# Altium PCB AX301_AX4010.PcbDoc (part 3 of 10)
Units mm, origin at the board's own origin, x right, y up, seen from the top; angles counter-clockwise.
Board outline 131.7 x 91.8 mm, 4 copper layers (Top Layer, GND, Mid-Layer 1, Bottom Layer); 191 components, 338 nets, 1108 pads, 420 vias.
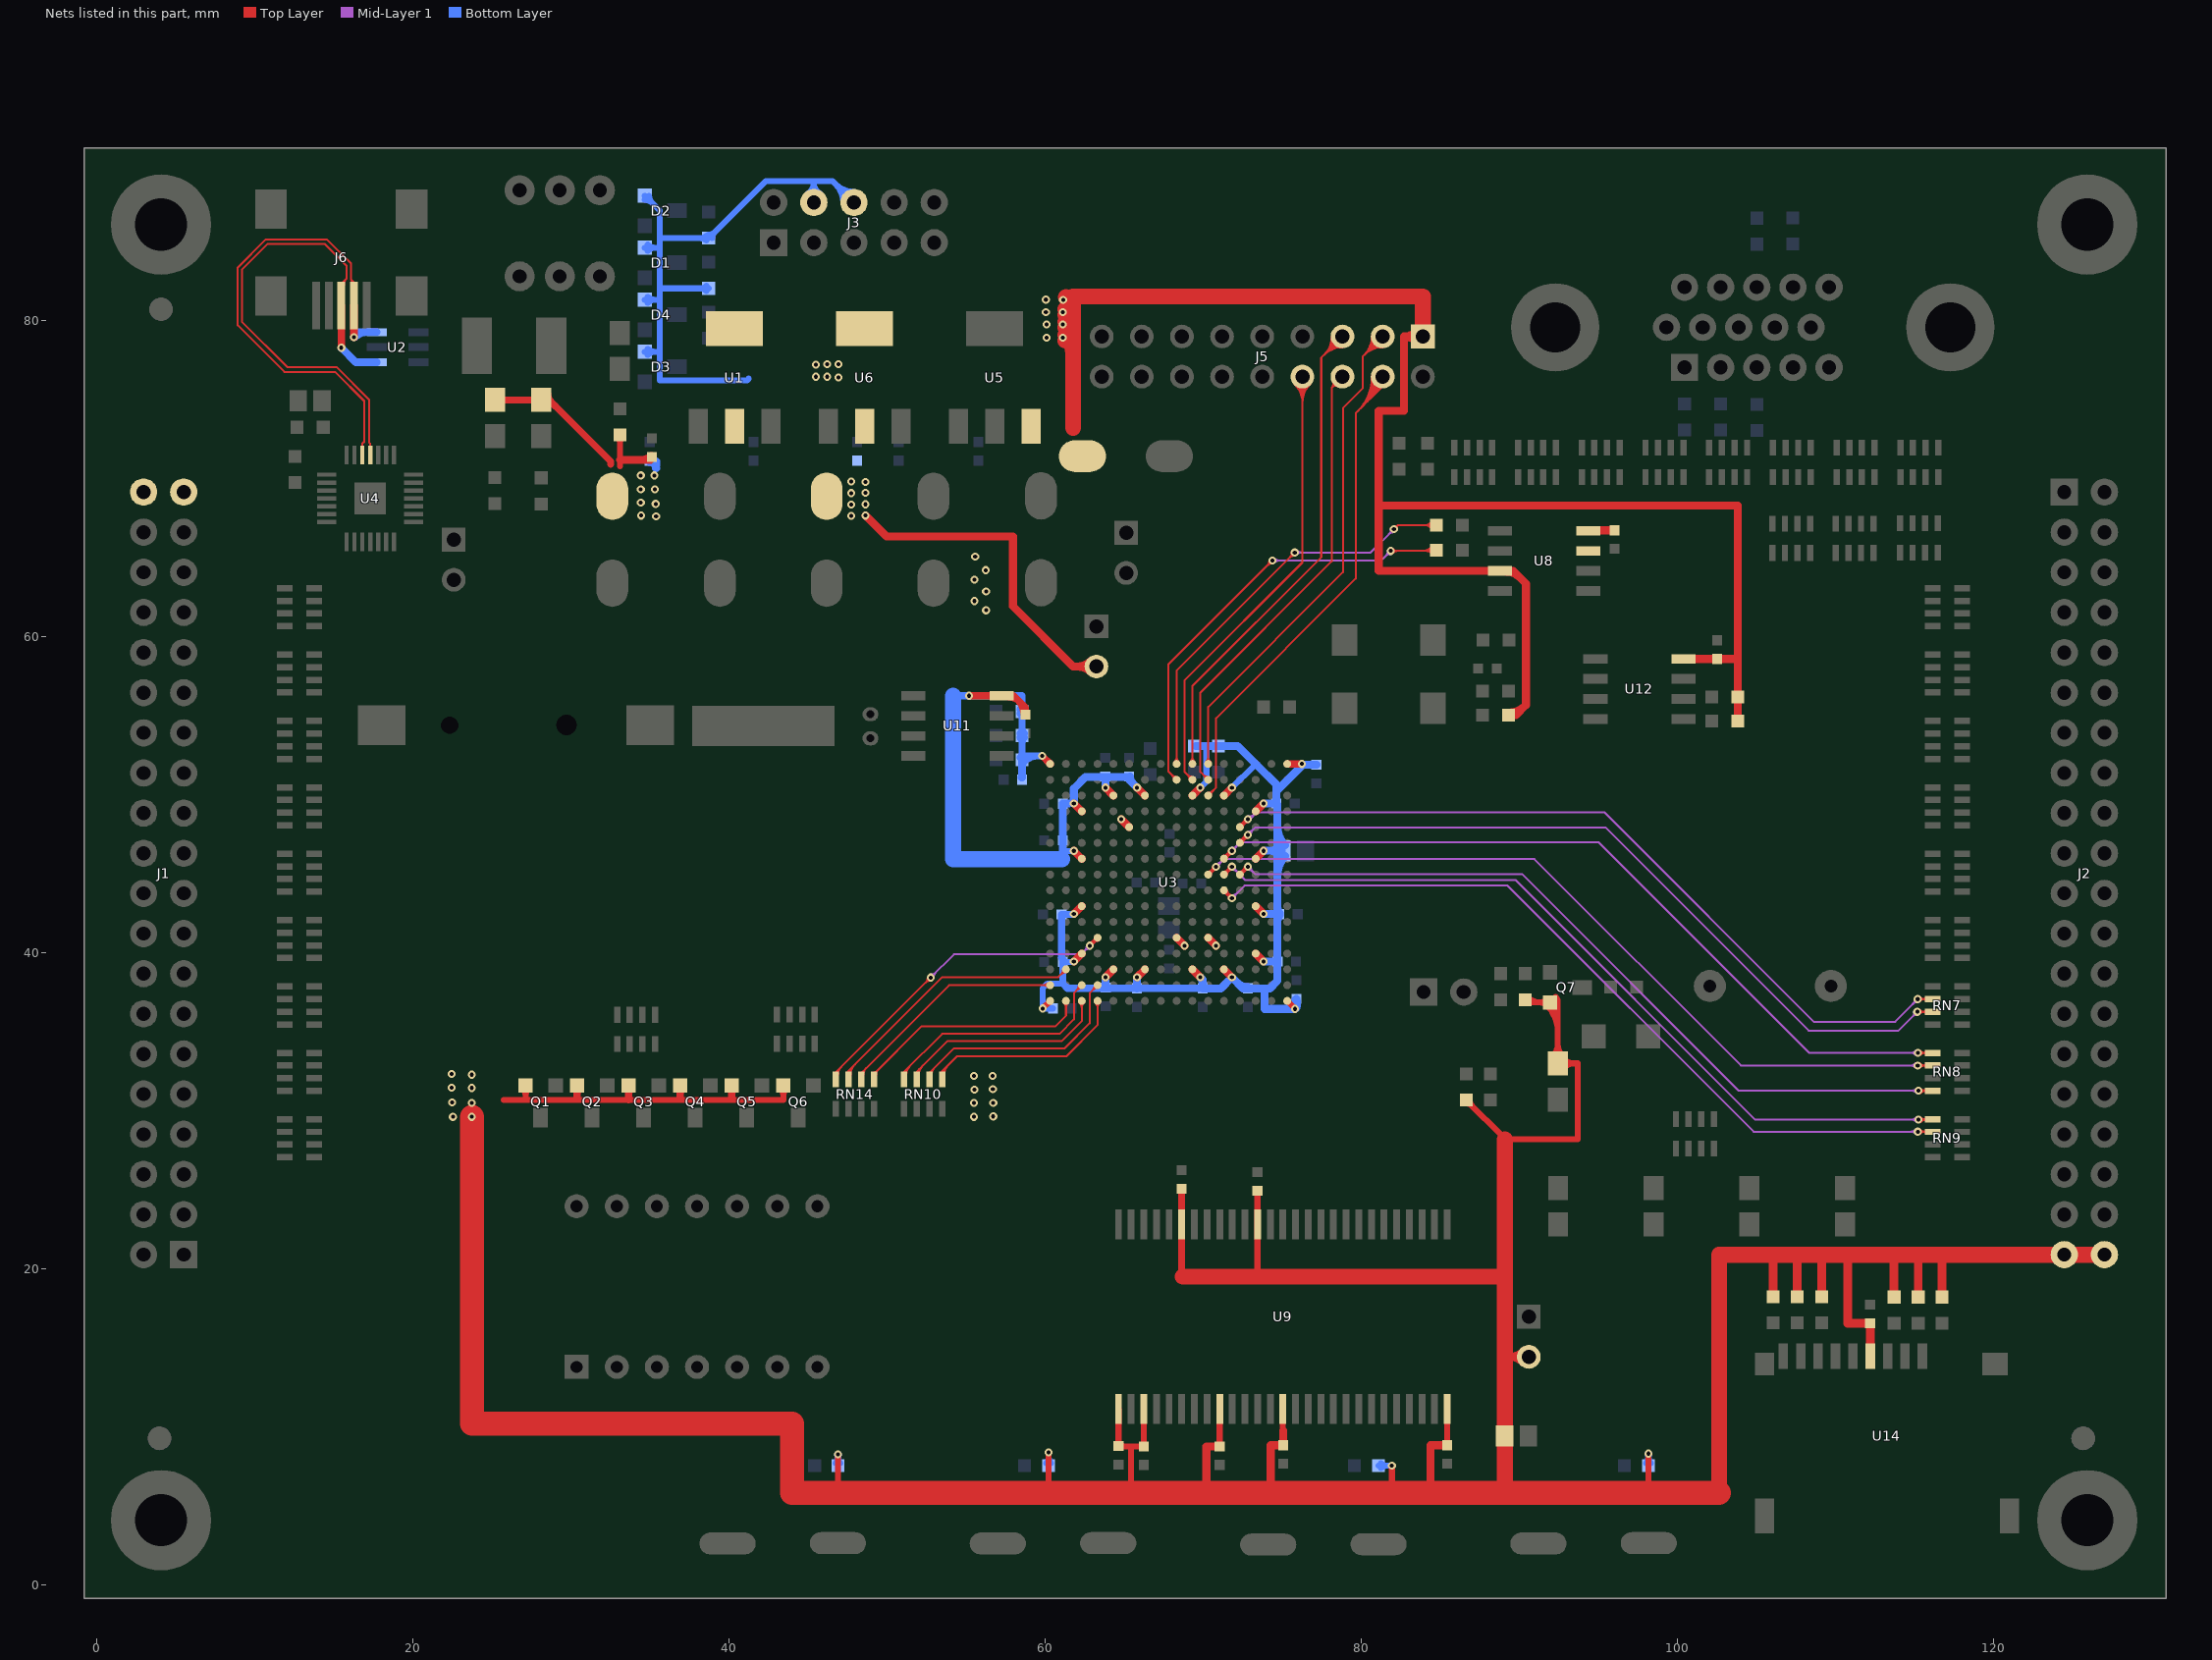
[diagram p5: the nets of this part, all layers, seen from the top]

## Via types
v1: diameter 0.508, hole 0.254, Top Layer to Bottom Layer, 377 vias
v2: diameter 0.762, hole 0.381, Top Layer to Bottom Layer, 41 vias
v3: diameter 1.016, hole 0.508, Top Layer to Bottom Layer, 2 vias

## Nets (pads, with @x,y where several pads share a name; then routed paths per layer and width w, separated by ;. In a path a pad name is that pad's centre, name@x,y a point inside that pad or via, vN(x,y) a via of type N, cw(c..) or ccw(c..) an arc to the next point about the centre after c; other vN are vias at no path point) (continued)
D2V5: C4.1 D1.2 D2.2 D3.2 D4.2 EC1.1 J3.4 J3.6 P3.2 R8.1 R15.1 U3.F12 U3.H12 U3.L5 U6.2 U6.4 | length 74.9
  Top Layer w0.5: v1(64.818,48.425) U3.L5@65.318,47.925 ; U3.H12@68.318,40.925 v1(68.818,40.425) ; U3.F12@70.318,40.925 v1(70.818,40.425)
  Top Layer w0.508: v1(48.641,67.64) 49.962,66.319 57.963,66.319 57.963,61.9 61.773,58.09 P3.2@63.246,58.09 ; P3.2@62.895,57.739 ccw(c62.049,56.892) 62.049,58.09 ccw(c62.049,59.287) P3.2@62.895,58.441
  Bottom Layer w0.381: D3.2@34.671,78.003 35.56,78.003 ; D4.2@34.671,81.297 35.577,81.297 ; D1.2@34.671,84.59 35.594,84.59 ; D2.2@34.671,87.617 cw(c34.671,86.973) 35.126,87.429 cw(c35.582,87.884) D2.2@34.938,87.884 ; D2.2@34.671,87.884 35.611,86.944 35.611,81.966 ; D3.2@34.86,77.815 cw(c35.315,77.36) 35.315,78.003 cw(c35.315,78.647) D3.2@34.86,78.192 ; D4.2@34.86,81.108 cw(c35.315,80.653) 35.315,81.297 cw(c35.315,81.941) D4.2@34.86,81.486 ; D1.2@34.86,84.402 cw(c35.315,83.947) 35.315,84.59 cw(c35.315,85.234) D1.2@34.86,84.779 ; 35.738,85.192 R8.1@38.71,85.192 42.316,88.798 46.558,88.798 J3.6@47.904,87.452 ; R15.1@38.557,81.864 ccw(c38.188,81.495) 38.188,82.017 ccw(c38.188,82.538) R15.1@38.557,82.169 ; R8.1@38.557,85.039 ccw(c38.188,84.67) 38.188,85.192 ccw(c38.188,85.713) R8.1@38.557,85.344 ; R15.1@38.71,82.017 35.662,82.017 35.611,81.966 ; R8.1@38.71,85.407 ccw(c38.71,85.929) 39.078,85.56 ccw(c39.447,85.192) R8.1@38.925,85.192 ; 41.25,76.302 41.148,76.2 35.611,76.2 35.611,81.966 ; J3.4@44.996,88.016 ccw(c44.55,88.697) 45.364,88.697 ; J3.4@45.364,87.452 45.364,88.697 ; J3.4@45.733,88.016 cw(c46.178,88.697) 45.364,88.697 ; J3.6@47.231,87.452 ccw(c45.606,87.452) 46.755,88.601 ccw(c47.904,89.75) J3.6@47.904,88.125
  other v1: 47.727,67.615 47.727,68.326 48.641,68.351 47.727,69.063 48.641,69.088 48.641,69.774 47.727,69.799 46.914,76.378 45.491,76.429 46.203,76.429 45.491,77.191 46.203,77.216 46.914,77.216
D3V3: C10.1 C11.1 C12.1 C13.1 C14.1 C15.1 C16.1 C17.1 C18.1 C19.1 C20.1 C22.1 C23.1 C24.2 C25.1 C26.1 C27.1 C28.1 C29.1 C30.1 C31.1 C32.1 C33.1 C34.1 C35.1 C36.1 C37.1 C43.1 C44.1 C47.1 C49.1 C50.1 EC5.1 EC6.1 J1.39 J1.40 J2.39 J2.40 J5.1 L1.1 LED5.1 LED7.1 LED8.1 P1.2 Q1.2 Q2.2 Q3.2 Q4.2 Q5.2 Q6.2 Q7.2 R1.1 R9.1 R10.1 R11.1 R23.1 R24.1 R25.1 R26.1 R27.1 R32.1 R35.1 R36.1 R37.1 R38.1 R41.1 R42.1 R43.1 R45.1 R47.1 R52.1 U1.2 U1.4 U3.A1 U3.A16 U3.C4 U3.C7 U3.C10 U3.C13 U3.E3 U3.E14 U3.G3 U3.G14 U3.K3 U3.K14 U3.M3 U3.M14 U3.P4 U3.P7 U3.P10 U3.P13 U3.T1 U3.T16 U5.3 U8.3 U8.7 U8.8 U9.1 U9.3 U9.9 U9.14 U9.27 U9.43 U9.49 U11.8 U12.8 U14.4 | length 599.8
  Top Layer w0.381: 25.73,30.658 27.127,30.658 ; Q1.2@26.939,31.384 cw(c26.483,30.928) 27.127,30.928 cw(c27.771,30.928) Q1.2@27.316,31.384 ; Q1.2@27.127,31.572 27.127,30.658 ; R1.1@32.944,72.593 cw(c32.575,72.224) 33.096,72.224 cw(c33.617,72.224) R1.1@33.249,72.593 ; 33.096,70.764 33.096,71.171 R1.1@33.096,72.746 ; Q6.2@43.245,31.384 cw(c42.79,30.928) 43.434,30.928 cw(c44.078,30.928) Q6.2@43.623,31.384 ; Q6.2@43.434,31.572 43.434,30.658 27.127,30.658 ; 46.888,5.791 v1(46.888,8.23) ; v1(59.842,36.449) U3.T16@60.318,36.925 ; 60.223,5.791 v1(60.223,8.357) ; U9.1@64.643,11.1 C30.1@64.643,8.763 64.643,8.738 65.443,8.738 ; C30.1@64.733,8.853 ccw(c65.01,9.13) 65.01,8.738 ; 65.443,5.791 65.443,8.738 ; U9.3@66.243,11.1 C29.1@66.243,8.738 65.443,8.738 ; C31.1@71.044,8.738 U9.9@71.043,11.1 ; 73.431,19.507 C35.1@73.431,24.917 ; 75.043,9.601 U9.14@75.043,11.1 ; U3.A16@75.318,36.925 v1(75.819,36.424) ; 81.94,5.817 v1(81.94,7.518) ; C33.1@85.443,8.816 U9.27@85.443,11.1 ; R11.1@86.639,30.442 cw(c86.639,29.921) 87.008,30.289 cw(c87.377,30.658) R11.1@86.855,30.658 ; R11.1@86.639,30.658 89.078,28.219 89.078,28.169 93.701,28.169 93.701,32.969 LED5.1@92.431,32.969 92.431,36.83 ; R32.1@90.373,37.008 90.373,36.83 Q7.2@91.948,36.83 92.431,36.83 ; R32.1@90.526,37.16 ccw(c91.324,37.958) 91.324,36.83 ; Q7.2@91.759,37.019 cw(c91.304,37.474) 91.304,36.83 cw(c91.304,36.186) 91.759,36.641 cw(c90.139,35.021) 92.431,35.021 ; Q7.2@92.029,36.911 cw(c91.059,35.941) 92.431,35.941 ; LED5.1@92.116,33.411 ccw(c91.357,34.169) 92.431,34.169 ccw(c93.504,34.169) LED5.1@92.745,33.411 ; Q7.2@92.174,36.688 cw(c92.431,36.527) 92.431,36.83 ; Q7.2@92.174,36.972 ccw(c92.431,37.133) 92.431,36.83 ; Q7.2@92.298,37.18 cw(c91.979,36.861) 92.431,36.861 ; LED5.1@92.745,32.655 cw(c93.504,31.896) 93.504,32.969 cw(c93.504,34.042) LED5.1@92.745,33.284 ; 98.171,5.867 v1(98.171,8.28)
  Top Layer w0.432: 68.643,19.482 U9.49@68.643,22.784 C34.1@68.643,25.032
  Top Layer w0.45: LED7.1@25.197,74.955 LED8.1@28.118,74.955 28.626,74.955 32.512,71.069 32.512,70.891 ; LED8.1@28.118,74.926 cw(c28.118,73.63) 29.035,74.547 ; LED8.1@28.528,75.336 ccw(c29.211,75.336) LED8.1@28.728,74.853 ; Q2.2@30.224,31.408 cw(c29.828,31.012) 30.389,31.012 cw(c30.949,31.012) Q2.2@30.553,31.408 ; 30.389,30.693 Q2.2@30.389,31.572 ; Q3.2@33.486,31.408 cw(c33.089,31.012) 33.65,31.012 cw(c34.211,31.012) Q3.2@33.814,31.408 ; 33.65,30.663 Q3.2@33.65,31.572 ; Q4.2@36.747,31.408 cw(c36.351,31.012) 36.911,31.012 cw(c37.472,31.012) Q4.2@37.075,31.408 ; 36.911,30.78 Q4.2@36.911,31.572 ; Q5.2@40.008,31.408 cw(c39.612,31.012) 40.173,31.012 cw(c40.733,31.012) Q5.2@40.337,31.408 ; 40.173,30.846 Q5.2@40.173,31.572 ; v1(55.194,56.236) U11.8@57.252,56.236 58.014,56.236 58.75,55.499 C36.1@58.75,55.042 ; U11.8@57.709,56.156 cw(c57.709,55.227) 58.365,55.884 ; 58.269,55.98 cw(c57.331,55.042) C36.1@58.658,55.042 ; v1(59.817,52.426) U3.T1@60.318,51.925 ; U3.A1@75.318,51.925 v1(76.244,51.925)
  Top Layer w0.5: v1(61.818,39.425) U3.P13@62.318,39.925 ; v1(61.818,42.425) U3.P10@62.318,42.925 ; v1(61.818,46.425) U3.P7@62.318,45.925 ; v1(61.818,49.425) U3.P4@62.318,48.925 ; v1(63.818,38.425) U3.M14@64.318,38.925 ; v1(63.818,50.425) U3.M3@64.318,49.925 ; v1(65.818,38.425) U3.K14@66.318,38.925 ; v1(65.818,50.425) U3.K3@66.318,49.925 ; U3.G14@69.318,38.925 v1(69.818,38.425) ; U3.G3@69.318,49.925 v1(69.818,50.425) ; U3.E14@71.318,38.925 v1(71.818,38.425) ; U3.E3@71.318,49.925 v1(71.818,50.425) ; U3.C13@73.318,39.925 v1(73.818,39.425) ; U3.C10@73.318,42.925 v1(73.818,42.425) ; U3.C7@73.318,45.925 v1(73.818,46.425) ; U3.C4@73.318,48.925 v1(73.818,49.425)
  Top Layer w0.508: 33.096,71.171 C44.1@35.027,71.171 ; 34.546,71.171 ccw(c34.546,71.931) C44.1@35.083,71.394 ; 70.206,5.842 70.206,8.738 C31.1@71.044,8.738 ; 74.27,5.791 74.27,8.814 C32.1@75.057,8.814 75.057,9.736 ; J5.1@83.545,78.623 ccw(c82.702,77.785) 82.702,78.973 ; J5.1@83.545,79.323 cw(c82.702,80.161) 82.702,78.973 ; J5.1@83.896,78.973 82.702,78.973 ; 84.379,5.791 84.379,8.814 C33.1@85.446,8.814 ; 89.078,14.402 P1.2@90.602,14.402 ; U8.3@89.23,64.084 cw(c89.23,63.042) 89.967,63.779 ; L1.1@89.332,55.016 89.789,55.016 90.424,55.651 90.424,63.322 89.611,64.135 U8.3@88.773,64.135 81.102,64.135 81.102,68.275 ; L1.1@89.332,55.169 ccw(c89.332,56.641) 90.372,55.6 ; P1.2@90.251,14.051 ccw(c89.404,13.204) 89.404,14.402 ccw(c89.404,15.599) P1.2@90.251,14.753 ; U8.8@94.361,66.707 C24.2@96.037,66.707 ; U12.8@100.406,58.572 C37.1@102.514,58.572 103.835,58.572 ; R24.1@103.835,54.635 R23.1@103.835,56.159 103.835,58.572 ; R42.1@115.24,18.186 115.24,20.87 ; 81.102,68.275 81.102,74.27 82.702,74.27 82.702,78.973 ; 81.102,68.275 103.835,68.275 103.835,58.572
  Top Layer w0.559: R52.1@106.07,18.212 106.07,20.87 ; R45.1@107.594,18.212 107.594,20.87 ; R41.1@109.144,18.212 109.144,20.87 ; 110.769,20.87 110.769,16.535 C43.1@112.192,16.535 112.209,16.535 U14.4@112.209,14.448 ; R43.1@113.716,18.186 113.716,20.87 ; R47.1@116.738,18.186 116.738,20.87
  Top Layer w1.016: 61.292,78.713 ccw(c60.131,79.874) 61.773,79.874 ; 61.292,79.072 cw(c60.131,77.911) 61.773,77.911 ; 61.292,79.551 ccw(c60.131,80.712) 61.773,80.712 ; 61.292,79.91 cw(c60.131,78.749) 61.773,78.749 ; 61.292,80.338 ccw(c60.131,81.499) 61.773,81.499 ; 61.292,80.698 cw(c60.131,79.537) 61.773,79.537 ; 61.317,81.46 cw(c60.218,80.36) 61.773,80.36 ; 61.773,73.203 61.773,81.509 83.896,81.509 J5.1@83.896,78.973 ; 68.707,19.482 88.951,19.482 89.078,19.355 ; 70.206,5.791 70.206,5.842 ; 89.078,5.791 89.078,14.402 89.078,19.355 ; 89.078,28.169 89.078,19.355 ; 102.641,5.791 102.641,20.87 106.07,20.87 107.594,20.87 109.144,20.87 110.769,20.87 113.716,20.87 115.24,20.87 116.738,20.87 J2.39@124.485,20.87 J2.40@127.025,20.87
  Top Layer w1.524: v1(23.724,29.591) 23.724,10.185 43.993,10.185 43.993,5.791 46.888,5.791 60.223,5.791 65.443,5.791 70.206,5.791 74.27,5.791 84.379,5.791 89.078,5.791 102.641,5.791
  Bottom Layer w0.381: R38.1@46.736,7.671 ccw(c46.367,8.04) 46.888,8.04 ccw(c47.41,8.04) R38.1@47.041,7.671 ; v1@46.833,8.198 cw(c46.555,8.037) 46.865,7.954 ; R38.1@46.888,7.518 v1(46.888,8.23) ; 46.911,7.954 cw(c47.222,8.037) v1@46.943,8.198 ; R37.1@60.071,7.671 ccw(c59.702,8.04) 60.223,8.04 ccw(c60.745,8.04) R37.1@60.376,7.671 ; R37.1@60.223,7.518 v1(60.223,8.357) ; C22.1@60.503,36.449 v1(59.842,36.449) 59.842,37.719 60.147,38.024 61.112,38.024 ; C23.1@61.112,39.395 v1@61.789,39.395 ; 61.163,46.406 v1@61.799,46.406 ; v1(69.818,50.425) 70.206,50.812 70.206,53.035 70.231,53.061 ; v1(71.818,50.425) 73.235,51.841 73.406,51.841 ; R36.1@81.102,7.518 v1(81.94,7.518) ; R36.1@81.255,7.366 cw(c81.623,6.997) 81.623,7.518 cw(c81.623,8.04) R36.1@81.255,7.671 ; R35.1@98.018,7.671 ccw(c97.65,8.04) 98.171,8.04 ccw(c98.692,8.04) R35.1@98.324,7.671 ; v1@98.116,8.249 cw(c97.799,8.066) 98.153,7.971 ; R35.1@98.171,7.518 v1(98.171,8.28) ; 98.189,7.971 cw(c98.543,8.066) v1@98.226,8.249
  Bottom Layer w0.45: 54.178,56.236 v1(55.194,56.236) 58.547,56.236 R27.1@58.547,55.245 R25.1@58.547,53.721 R26.1@58.547,52.426 ; R26.1@58.419,52.325 ccw(c58.109,52.635) 58.547,52.635 ccw(c58.985,52.635) R26.1@58.675,52.325 ; R25.1@58.419,53.593 cw(c58.109,53.283) 58.547,53.283 cw(c58.985,53.283) R25.1@58.675,53.593 ; R25.1@58.419,53.849 ccw(c58.109,54.159) 58.547,54.159 ccw(c58.985,54.159) R25.1@58.675,53.849 ; R27.1@58.419,55.117 cw(c58.109,54.807) 58.547,54.807 cw(c58.985,54.807) R27.1@58.675,55.117 ; R27.1@58.419,55.373 ccw(c58.109,55.683) 58.547,55.683 ccw(c58.985,55.683) R27.1@58.675,55.373 ; R26.1@58.547,52.197 R26.1@58.547,52.426 ; R26.1@58.675,52.069 cw(c59.537,51.207) 59.537,52.426 ; v1(59.817,52.426) R26.1@58.547,52.426 ; 61.036,39.803 ccw(c61.52,39.803) C23.1@61.178,39.461 ; v1(61.818,42.425) 61.786,42.393 C17.1@61.036,42.393 61.036,39.676 61.112,39.599 C23.1@61.112,39.395 61.112,38.024 61.411,37.726 C18.1@65.818,37.726 ; 63.5,37.726 ccw(c63.5,38.1) C47.1@63.765,37.835 ; C47.1@63.896,37.835 ccw(c64.16,38.1) 64.16,37.726 ; C18.1@65.811,37.719 C28.1@69.977,37.719
  Bottom Layer w0.5: C10.1@58.522,51.079 58.547,51.079 R26.1@58.547,52.197 ; 63.144,51.092 C13.1@63.818,51.092 ; C47.1@63.818,37.782 v1(63.818,38.425) ; v1(63.818,50.425) C13.1@63.818,51.092 ; C12.1@65.112,51.092 C13.1@63.818,51.092 ; C12.1@65.303,51.105 65.303,50.939 v1(65.818,50.425) ; C12.1@65.371,51.13 ccw(c65.995,51.13) 65.554,50.689 ; C18.1@65.818,37.726 v1(65.818,38.425) ; R10.1@69.52,53.061 70.231,53.061 R9.1@70.968,53.061 72.187,53.061 73.406,51.841 74.625,50.622 74.625,50.19 ; v1@69.815,38.422 cw(c69.425,38.031) C28.1@69.977,38.031 ; C28.1@69.918,37.751 ccw(c69.414,38.021) v1(69.818,38.425) 69.977,38.266 C28.1@69.977,37.719 71.112,37.719 v1(71.818,38.425) 72.524,37.719 C27.1@72.822,37.719 73.889,37.719 ; 72.198,38.045 ccw(c72.822,38.669) C27.1@72.822,37.787 ; v1(73.818,39.425) C25.1@74.698,39.425 ; v1(73.818,42.425) C20.1@74.701,42.425 ; v1(73.818,46.425) C19.1@74.701,46.425 ; v1(73.818,49.425) C16.1@74.621,49.425 ; 73.889,37.236 73.889,37.719 ; C16.1@74.577,49.381 cw(c74.278,49.081) 74.701,49.081 ; C16.1@74.625,49.428 74.625,50.19 ; 74.701,42.001 cw(c75.211,42.001) C20.1@74.851,42.362 ; 74.701,42.818 ccw(c75.211,42.818) C20.1@74.851,42.457 ; 74.701,44.896 cw(c76.38,44.896) C19.1@75.193,46.082 ; 74.701,47.953 ccw(c76.38,47.953) C19.1@75.193,46.767 ; C16.1@74.701,49.352 C19.1@74.701,46.425 ; C19.1@74.769,46.212 ccw(c74.257,45.7) 74.257,46.425 ccw(c74.257,47.149) C19.1@74.769,46.637 ; C19.1@74.981,46.425 C19.1@74.701,46.425 ; C11.1@75.844,37.015 cw(c75.51,36.733) v1(75.819,36.424) 75.895,36.5 C11.1@75.895,37.059 ; C15.1@77.165,51.867 76.302,51.867 74.625,50.19 ; 73.889,37.719 74.219,37.719 74.701,38.202 C25.1@74.701,39.421 C20.1@74.701,42.425 ; C20.1@74.701,42.425 C19.1@74.701,46.425
  Bottom Layer w0.508: C49.1@34.973,71.057 cw(c34.952,70.627) 35.382,70.627 ; 35.382,70.841 35.382,71.069 ; 61.065,45.898 61.112,45.898 C26.1@61.112,47.092 C14.1@61.112,49.403 61.112,49.425 61.493,49.425 ; v1(61.818,49.425) 61.818,50.363 62.547,51.092 63.144,51.092 ; 73.889,37.236 73.889,36.424 v1(75.819,36.424)
  Bottom Layer w1.016: 54.178,56.236 54.178,45.898 61.065,45.898
  other v1: 22.53,29.591 55.499,29.591 56.718,29.616 23.724,30.48 55.499,30.48 56.718,30.48 22.479,30.505 55.524,31.318 56.693,31.344 23.724,31.42 22.454,31.445 55.499,32.182 56.667,32.182 23.724,32.258 22.454,32.309 56.261,61.646 55.524,62.23 56.261,62.84 55.524,63.576 56.236,64.186 55.575,65.049 35.382,67.589 34.442,67.64 35.357,68.377 34.417,68.453 34.417,69.291 35.306,69.291 34.417,70.18 35.281,70.18 60.096,78.892 61.112,78.892 60.096,79.731 61.112,79.731 60.046,80.518 61.112,80.518 61.138,81.28 60.046,81.305
D5: RN7.2 U3.D5 | length 54.2
  Top Layer w0.127: v1(115.208,37.04) RN7.2@116.154,37.04 ; v1@115.343,36.905 cw(c115.668,36.58) 115.668,37.04 cw(c115.668,37.5) v1@115.343,37.174 ; RN7.2@115.758,36.943 ccw(c115.525,36.71) 115.525,37.04 ccw(c115.525,37.369) RN7.2@115.758,37.136
  Top Layer w0.254: U3.D5@72.318,47.925 v1(72.818,48.425) ; U3.D5@72.318,48.048 ccw(c72.318,48.345) 72.528,48.135 ccw(c72.738,47.925) U3.D5@72.441,47.925 ; v1@72.691,48.425 cw(c72.384,48.425) 72.601,48.208 cw(c72.818,47.991) v1@72.818,48.298
  Mid-Layer 1 w0.127: v1(72.818,48.425) 72.961,48.425 73.406,48.87 95.377,48.87 108.636,35.611 113.779,35.611 v1(115.208,37.04) ; v1@72.818,48.488 ccw(c72.818,48.987) 73.171,48.634 ; v1@72.818,48.615 ccw(c72.818,49.42) 73.387,48.851 ; v1@115.017,37.04 cw(c114.558,37.04) 114.883,36.714 cw(c115.208,36.389) v1@115.208,36.849
D6: RN7.3 U3.D6 | length 53.7
  Top Layer w0.127: v1(115.183,36.24) RN7.3@116.154,36.24 ; v1@115.318,36.105 cw(c115.643,35.78) 115.643,36.24 cw(c115.643,36.7) v1@115.318,36.374 ; RN7.3@115.758,36.143 ccw(c115.525,35.91) 115.525,36.24 ccw(c115.525,36.569) RN7.3@115.758,36.336
  Top Layer w0.254: U3.D6@72.318,46.925 v1(72.818,47.425) ; U3.D6@72.318,47.048 ccw(c72.318,47.345) 72.528,47.135 ccw(c72.738,46.925) U3.D6@72.441,46.925 ; v1@72.691,47.425 cw(c72.384,47.425) 72.601,47.208 cw(c72.818,46.991) v1@72.818,47.298
  Mid-Layer 1 w0.127: v1(72.818,47.425) 73.298,47.904 95.453,47.904 108.306,35.052 113.995,35.052 v1(115.183,36.24) ; v1@72.818,47.615 ccw(c72.818,48.075) 73.143,47.75 ccw(c73.468,47.425) v1@73.009,47.425 ; v1@114.992,36.24 cw(c114.532,36.24) 114.858,35.914 cw(c115.183,35.589) v1@115.183,36.049
D8: RN8.4 U3.D8 | length 53.9
  Top Layer w0.127: v1(115.265,31.242) RN8.4@116.151,31.242 ; v1@115.4,31.107 cw(c115.725,30.782) 115.725,31.242 cw(c115.725,31.702) v1@115.4,31.377 ; v1@115.43,31.337 ccw(c115.635,31.456) 115.574,31.227 ; v1@115.437,31.161 cw(c115.547,31.109) 115.578,31.226 ; v1@115.518,31.242 cw(c115.518,30.903) RN8.4@115.758,31.143 ; 115.532,31.242 ccw(c115.532,31.562) RN8.4@115.758,31.336
  Top Layer w0.254: U3.D8@72.318,44.925 v1(72.818,45.425) ; U3.D8@72.318,45.048 ccw(c72.318,45.345) 72.528,45.135 ccw(c72.738,44.925) U3.D8@72.441,44.925 ; v1@72.691,45.425 cw(c72.384,45.425) 72.601,45.208 cw(c72.818,44.991) v1@72.818,45.298
  Mid-Layer 1 w0.127: v1@72.818,45.234 cw(c72.818,44.774) 73.143,45.099 cw(c73.468,45.425) v1@73.009,45.425 ; v1(72.818,45.425) 73.285,44.958 90.17,44.958 103.886,31.242 v1(115.265,31.242) ; v1@115.13,31.107 ccw(c114.805,30.782) 114.805,31.242 ccw(c114.805,31.702) v1@115.13,31.377
DATA0: R5.1 U3.H2 | length 32.8
  Top Layer w0.127: U3.H2@68.131,50.925 ccw(c67.681,50.925) 68,51.243 ccw(c68.318,51.561) U3.H2@68.318,51.111 ; U3.H2@68.318,50.925 67.793,51.45 67.793,58.217 v1(74.371,64.795) ; v1@74.181,64.795 cw(c73.721,64.795) 74.046,64.47 cw(c74.371,64.145) v1@74.371,64.605 ; v1(81.864,65.405) R5.1@84.709,65.405 ; v1@81.999,65.27 cw(c82.324,64.945) 82.324,65.405 cw(c82.324,65.865) v1@81.999,65.54 ; 83.809,65.405 ccw(c83.809,66.406) R5.1@84.517,65.698 ; 84.055,65.405 cw(c84.055,64.751) R5.1@84.517,65.213 ; 84.116,65.405 ccw(c84.116,66.1) R5.1@84.607,65.608
  Mid-Layer 1 w0.127: v1(74.371,64.795) 81.255,64.795 v1(81.864,65.405) ; v1@74.506,64.661 cw(c74.831,64.335) 74.831,64.795 cw(c74.831,65.255) v1@74.506,64.93 ; v1@81.674,65.405 cw(c81.214,65.405) 81.539,65.08 cw(c81.864,64.755) v1@81.864,65.215
DCLK: R14.1 U3.H1 | length 31.6
  Top Layer w0.127: U3.H1@68.186,52.056 ccw(c67.868,52.375) 68.318,52.375 ccw(c68.768,52.375) U3.H1@68.45,52.056 ; U3.H1@68.318,51.925 68.318,57.828 v1(75.794,65.303) ; v1@75.603,65.303 cw(c75.143,65.303) 75.468,64.978 cw(c75.794,64.653) v1@75.794,65.113 ; v1(82.067,66.777) 82.321,67.031 ; v1@82.103,66.964 ccw(c82.149,67.203) 82.321,67.031 ; v1@82.254,66.813 cw(c82.493,66.858) 82.321,67.031 ; R14.1@84.517,66.788 ccw(c83.932,66.203) 83.932,67.031 ccw(c83.932,67.858) R14.1@84.517,67.273 ; R14.1@84.607,66.878 ccw(c84.239,66.509) 84.239,67.031 ccw(c84.239,67.552) R14.1@84.607,67.183 ; R14.1@84.76,67.031 82.321,67.031
  Mid-Layer 1 w0.127: v1(75.794,65.303) 80.594,65.303 v1(82.067,66.777) ; v1@75.928,65.169 cw(c76.254,64.843) 76.254,65.303 cw(c76.254,65.763) v1@75.928,65.438 ; v1@81.877,66.777 cw(c81.417,66.777) 81.742,66.451 cw(c82.067,66.126) v1@82.067,66.586
DIG0: RN14.7 U3.R14 | length 19.4
  Top Layer w0.127: RN14.7@47.444,32.257 cw(c47.745,32.257) 47.532,32.47 ; RN14.7@47.491,32.374 ccw(c47.415,32.499) 47.561,32.499 ; RN14.7@47.561,31.957 47.561,32.499 ; RN14.7@47.571,32.257 cw(c48.179,32.257) 47.749,32.687 ; RN14.7@47.632,32.374 cw(c47.708,32.499) 47.561,32.499 ; RN14.7@47.698,32.257 cw(c48.612,32.257) 47.966,32.903 ; U3.R14@61.132,38.925 cw(c60.681,38.925) 61,38.606 cw(c61.318,38.288) U3.R14@61.318,38.738 ; U3.R14@61.318,38.925 60.824,38.43 53.492,38.43 47.561,32.499
DIG1: RN10.5 U3.N16 | length 15.1
  Top Layer w0.127: RN10.5@53.421,32.38 ccw(c53.376,32.474) 53.479,32.474 ; RN10.5@53.479,31.957 53.479,32.474 ; RN10.5@53.489,32.257 cw(c54.035,32.257) 53.649,32.643 ; RN10.5@53.538,32.38 cw(c53.583,32.474) 53.479,32.474 ; RN10.5@53.616,32.257 cw(c54.468,32.257) 53.866,32.86 ; U3.N16@63.186,36.793 cw(c62.868,36.474) 63.318,36.474 cw(c63.768,36.474) U3.N16@63.45,36.793 ; U3.N16@63.318,36.925 63.318,35.403 61.341,33.426 54.432,33.426 53.479,32.474
DIG2: RN10.7 U3.P16 | length 15.2
  Top Layer w0.127: RN10.7@51.879,31.957 51.879,32.448 53.823,34.392 61.062,34.392 62.318,35.648 U3.P16@62.318,36.925 ; RN10.7@51.889,32.257 cw(c52.374,32.257) 52.031,32.6 ; RN10.7@52.016,32.257 cw(c52.807,32.257) 52.248,32.817 ; U3.P16@62.186,36.793 cw(c61.868,36.474) 62.318,36.474 cw(c62.768,36.474) U3.P16@62.45,36.793
DIG3: RN14.6 U3.T15 | length 16
  Top Layer w0.127: RN14.6@48.361,31.957 48.361,32.359 53.927,37.925 U3.T15@60.318,37.925 ; RN14.6@48.371,32.257 cw(c48.641,32.257) RN14.6@48.45,32.448 ; RN14.6@48.498,32.257 cw(c49.075,32.257) 48.667,32.665 ; U3.T15@60.186,37.793 ccw(c59.868,37.474) 59.868,37.925 ccw(c59.868,38.375) U3.T15@60.186,38.056
DIG4: RN10.8 U3.P15 | length 16.6
  Top Layer w0.127: RN10.8@51.079,31.957 51.079,32.436 53.492,34.849 60.909,34.849 61.818,35.758 61.818,37.425 U3.P15@62.318,37.925 ; RN10.8@51.089,32.257 cw(c51.543,32.257) 51.222,32.578 ; RN10.8@51.216,32.257 cw(c51.977,32.257) 51.439,32.795 ; U3.P15@62.132,37.925 cw(c61.681,37.925) 62,37.606 cw(c62.318,37.288) U3.P15@62.318,37.738
DIG5: RN14.8 U3.N12 | length 24.5
  Top Layer w0.127: RN14.8@46.761,31.957 46.761,32.41 v1(52.756,38.405) ; RN14.8@46.771,32.257 cw(c47.164,32.257) 46.886,32.535 ; RN14.8@46.898,32.257 cw(c47.598,32.257) 47.103,32.752 ; v1@52.565,38.405 cw(c52.105,38.405) 52.431,38.08 cw(c52.756,37.754) v1@52.756,38.214
  Top Layer w0.254: v1(62.818,40.425) U3.N12@63.318,40.925 ; v1@62.818,40.552 ccw(c62.818,40.858) 63.035,40.641 ccw(c63.252,40.425) v1@62.945,40.425 ; U3.N12@63.195,40.925 cw(c62.898,40.925) 63.108,40.715 cw(c63.318,40.505) U3.N12@63.318,40.802
  Mid-Layer 1 w0.127: v1(52.756,38.405) 54.229,39.878 62.271,39.878 v1(62.818,40.425) ; v1@52.756,38.595 ccw(c52.756,39.055) 53.081,38.73 ccw(c53.406,38.405) v1@52.946,38.405 ; v1@62.627,40.425 cw(c62.168,40.425) 62.493,40.099 cw(c62.818,39.774) v1@62.818,40.234
DIG6: RN10.6 U3.N15 | length 15.9
  Top Layer w0.127: RN10.6@52.679,31.957 52.679,32.385 54.229,33.934 61.239,33.934 62.818,35.513 62.818,37.425 U3.N15@63.318,37.925 ; RN10.6@52.689,32.257 cw(c53.02,32.257) 52.786,32.491 ; RN10.6@52.816,32.257 cw(c53.454,32.257) 53.003,32.708 ; U3.N15@63.132,37.925 cw(c62.681,37.925) 63,37.606 cw(c63.318,37.288) U3.N15@63.318,37.738
DIG7: RN14.5 U3.R16 | length 16.2
  Top Layer w0.127: RN14.5@49.161,31.957 49.161,32.296 52.197,35.331 60.655,35.331 61.318,35.994 U3.R16@61.318,36.925 ; RN14.5@49.161,32.394 ccw(c49.161,32.629) 49.328,32.463 ; RN14.5@49.298,32.257 cw(c49.721,32.257) 49.422,32.556 ; U3.R16@61.186,36.793 cw(c60.868,36.474) 61.318,36.474 cw(c61.768,36.474) U3.R16@61.45,36.793
DM: J6.2 U2.3 U4.5 | length 33.7
  Top Layer w0.127: J6.2@16.111,82.282 ccw(c15.911,82.408) 16.078,82.575 ; 16.191,82.463 cw(c16.049,82.321) J6.2@16.218,82.214 ; J6.2@16.269,80.932 16.269,82.385 16.078,82.575 ; U4.5@16.745,71.991 ccw(c16.623,72.113) 16.796,72.113 ccw(c16.969,72.113) U4.5@16.847,71.991 ; U4.5@16.796,71.476 16.796,72.193 16.916,72.314 16.916,74.89 15.073,76.733 11.862,76.733 8.915,79.68 8.915,83.337 10.693,85.115 14.554,85.115 16.078,83.591 16.078,82.575
  Top Layer w0.483: v1(16.269,78.918) J6.2@16.269,80.932
  Bottom Layer w0.483: v1(16.269,78.918) 16.599,79.248 U2.3@17.704,79.248 ; v1@16.278,78.909 cw(c17.096,78.09) U2.3@17.096,79.248
DP: J6.3 U2.1 U4.4 | length 33.8
  Top Layer w0.127: J6.3@15.469,80.932 15.469,82.321 15.799,82.652 ; J6.3@15.527,82.191 cw(c15.854,82.24) 15.621,82.473 ; J6.3@15.653,82.21 cw(c16.164,82.286) 15.799,82.652 ; U4.4@17.245,71.991 ccw(c17.123,72.113) 17.296,72.113 ccw(c17.469,72.113) U4.4@17.347,71.991 ; U4.4@17.296,71.476 17.296,72.188 17.22,72.264 17.22,74.982 15.164,77.038 12.04,77.038 9.195,79.883 9.195,83.222 10.809,84.836 14.402,84.836 15.799,83.439 15.799,82.652
  Top Layer w0.483: v1(15.469,78.257) J6.3@15.469,80.932
  Bottom Layer w0.483: v1(15.469,78.257) 16.383,77.343 U2.1@17.704,77.343
E7: RN8.1 U3.E7 | length 54.4
  Top Layer w0.127: v1(115.224,33.639) RN8.1@116.154,33.639 ; v1@115.359,33.504 cw(c115.684,33.179) 115.684,33.639 cw(c115.684,34.099) v1@115.359,33.774 ; RN8.1@115.758,33.543 ccw(c115.525,33.31) 115.525,33.639 ccw(c115.525,33.969) RN8.1@115.758,33.736
  Top Layer w0.254: U3.E7@71.318,45.925 v1(71.818,46.425) ; U3.E7@71.318,46.048 ccw(c71.318,46.345) 71.528,46.135 ccw(c71.738,45.925) U3.E7@71.441,45.925 ; v1@71.691,46.425 cw(c71.384,46.425) 71.601,46.208 cw(c71.818,45.991) v1@71.818,46.298
  Mid-Layer 1 w0.127: v1(71.818,46.425) 72.358,46.965 95.021,46.965 108.347,33.639 v1(115.224,33.639) ; v1@71.818,46.615 ccw(c71.818,47.075) 72.143,46.75 ccw(c72.468,46.425) v1@72.009,46.425 ; v1@115.089,33.504 ccw(c114.764,33.179) 114.764,33.639 ccw(c114.764,34.099) v1@115.089,33.774
E8: RN9.1 U3.E8 | length 55.7
  Top Layer w0.127: v1(115.265,29.413) RN9.1@116.129,29.413 ; v1@115.4,29.278 cw(c115.725,28.953) 115.725,29.413 cw(c115.725,29.873) v1@115.4,29.548 ; v1@115.429,29.51 ccw(c115.55,29.581) 115.586,29.446 ccw(c115.648,29.212) v1@115.434,29.325 ; v1@115.463,29.413 ccw(c115.463,29.829) RN9.1@115.758,29.535 ; 115.586,29.413 cw(c115.586,29.17) RN9.1@115.758,29.342
  Top Layer w0.254: U3.E8@71.318,44.925 v1(71.818,45.425) ; U3.E8@71.318,45.048 ccw(c71.318,45.345) 71.528,45.135 ccw(c71.738,44.925) U3.E8@71.441,44.925 ; v1@71.691,45.425 cw(c71.384,45.425) 71.601,45.208 cw(c71.818,44.991) v1@71.818,45.298
  Mid-Layer 1 w0.127: v1@71.818,45.234 cw(c71.818,44.774) 72.143,45.099 cw(c72.468,45.425) v1@72.009,45.425 ; v1(71.818,45.425) 72.666,44.577 89.764,44.577 104.927,29.413 v1(115.265,29.413) ; v1@115.13,29.278 ccw(c114.805,28.953) 114.805,29.413 ccw(c114.805,29.873) v1@115.13,29.548
E9: RN9.2 U3.E9 | length 55.4
  Top Layer w0.127: v1(115.214,28.651) RN9.2@116.142,28.651 ; v1@115.349,28.516 cw(c115.674,28.191) 115.674,28.651 cw(c115.674,29.111) v1@115.349,28.786 ; 115.494,28.651 cw(c115.494,28.279) RN9.2@115.758,28.542 ; 115.555,28.651 ccw(c115.555,28.938) RN9.2@115.758,28.735
  Top Layer w0.254: U3.E9@71.318,43.802 cw(c71.318,43.505) 71.528,43.715 cw(c71.738,43.925) U3.E9@71.441,43.925 ; U3.E9@71.318,43.925 v1(71.818,43.425) ; v1@71.691,43.425 ccw(c71.384,43.425) 71.601,43.641 ccw(c71.818,43.858) v1@71.818,43.552
  Mid-Layer 1 w0.127: v1(71.818,43.425) 72.615,44.221 89.256,44.221 104.826,28.651 v1(115.214,28.651) ; v1@71.818,43.615 ccw(c71.818,44.075) 72.143,43.75 ccw(c72.468,43.425) v1@72.009,43.425 ; v1@115.08,28.516 ccw(c114.754,28.191) 114.754,28.651 ccw(c114.754,29.111) v1@115.08,28.786
F1: J5.3 U3.F1 | length 38.7
  Top Layer w0.127: U3.F1@70.186,52.056 ccw(c69.868,52.375) 70.318,52.375 ccw(c70.768,52.375) U3.F1@70.45,52.056 ; U3.F1@70.318,51.925 70.318,55.535 78.842,64.059 78.842,74.447 80.086,75.692 80.086,77.703 J5.3@81.356,78.973 ; J5.3@80.67,78.973 cw(c79.012,78.973) 80.184,77.801 cw(c81.356,76.629) J5.3@81.356,78.287 ; J5.3@80.797,78.973 cw(c79.446,78.973) 80.401,78.018 cw(c81.356,77.063) J5.3@81.356,78.414 ; J5.3@80.924,78.973 cw(c79.88,78.973) 80.618,78.235 cw(c81.356,77.496) J5.3@81.356,78.541
F2: J5.6 U3.F2 | length 31.7
  Top Layer w0.127: U3.F2@70.132,50.925 ccw(c69.681,50.925) 70,51.243 ccw(c70.318,51.561) U3.F2@70.318,51.111 ; U3.F2@70.318,50.925 69.825,51.418 69.825,56.439 78.13,64.745 78.13,75.747 J5.6@78.816,76.433 ; J5.6@78.197,76.137 cw(c77.889,75.989) 78.13,75.747 cw(c78.372,75.506) J5.6@78.52,75.814 ; J5.6@78.312,76.191 cw(c78.06,76.071) 78.257,75.874 cw(c78.454,75.677) J5.6@78.575,75.928
F3: J5.4 U3.F3 | length 44
  Top Layer w0.127: U3.F3@70.318,49.925 70.815,50.422 70.815,54.813 79.654,63.652 79.654,74.117 81.356,75.819 J5.4@81.356,76.433 ; U3.F3@70.318,50.111 ccw(c70.318,50.561) 70.636,50.243 ccw(c70.955,49.925) U3.F3@70.504,49.925 ; 79.75,74.213 ccw(c77.53,76.433) J5.4@80.67,76.433 ; 79.967,74.43 ccw(c77.964,76.433) J5.4@80.797,76.433 ; 80.184,74.647 ccw(c78.397,76.433) J5.4@80.924,76.433 ; 80.401,74.863 ccw(c78.831,76.433) J5.4@81.051,76.433 ; 80.617,75.08 ccw(c79.264,76.433) J5.4@81.178,76.433 ; 80.834,75.297 ccw(c79.698,76.433) J5.4@81.305,76.433 ; 81.051,75.514 ccw(c80.132,76.433) J5.4@81.432,76.433
F8: RN8.2 U3.F8 | length 57.4
  Top Layer w0.127: U3.F8@70.318,44.925 v1(70.809,45.415) ; U3.F8@70.318,45.111 ccw(c70.318,45.561) 70.636,45.243 ccw(c70.955,44.925) U3.F8@70.504,44.925 ; U3.F8@70.403,45.108 ccw(c70.184,45.488) v1@70.619,45.437 ; U3.F8@70.502,45.01 cw(c70.882,44.79) v1@70.831,45.226 ; 70.574,45.207 cw(c70.696,44.995) v1@70.759,45.231 ; 70.6,45.18 ccw(c70.388,45.303) v1@70.625,45.366 ; v1@70.618,45.415 cw(c70.158,45.415) 70.483,45.09 cw(c70.809,44.765) v1@70.809,45.225 ; 70.622,45.235 ccw(c70.497,45.452) v1@70.746,45.423 ; 70.628,45.229 cw(c70.845,45.103) v1@70.816,45.352 ; v1(115.211,32.839) RN8.2@116.154,32.839 ; v1@115.346,32.704 cw(c115.671,32.379) 115.671,32.839 cw(c115.671,33.299) v1@115.346,32.974 ; RN8.2@115.758,32.743 ccw(c115.525,32.51) 115.525,32.839 ccw(c115.525,33.169) RN8.2@115.758,32.936
  Mid-Layer 1 w0.127: v1(70.809,45.415) 71.291,45.898 90.957,45.898 104.016,32.839 v1(115.211,32.839) ; v1@70.809,45.606 ccw(c70.809,46.066) 71.134,45.74 ccw(c71.459,45.415) v1@70.999,45.415 ; v1@115.077,32.704 ccw(c114.751,32.379) 114.751,32.839 ccw(c114.751,33.299) v1@115.077,32.974
G1: J5.5 U3.G1 | length 38.1
  Top Layer w0.127: U3.G1@69.186,52.056 ccw(c68.868,52.375) 69.318,52.375 ccw(c69.768,52.375) U3.G1@69.45,52.056 ; U3.G1@69.318,51.925 69.318,56.847 77.47,64.999 77.47,77.627 J5.5@78.816,78.973 ; J5.5@78.13,78.973 cw(c76.472,78.973) 77.644,77.801 cw(c78.816,76.629) J5.5@78.816,78.287 ; J5.5@78.257,78.973 cw(c76.906,78.973) 77.861,78.018 cw(c78.816,77.063) J5.5@78.816,78.414 ; J5.5@78.384,78.973 cw(c77.34,78.973) 78.078,78.235 cw(c78.816,77.496) J5.5@78.816,78.541
G2: J5.8 U3.G2 | length 35.9
  Top Layer w0.127: U3.G2@69.132,50.925 ccw(c68.681,50.925) 69,51.243 ccw(c69.318,51.561) U3.G2@69.318,51.111 ; U3.G2@69.318,50.925 68.834,51.409 68.834,57.226 76.276,64.668 J5.8@76.276,76.433 ; J5.8@75.791,75.948 cw(c74.619,74.776) 76.276,74.776 cw(c77.934,74.776) J5.8@76.762,75.948 ; J5.8@75.881,76.037 cw(c74.925,75.082) 76.276,75.082 cw(c77.627,75.082) J5.8@76.672,76.037 ; J5.8@75.97,76.127 cw(c75.232,75.389) 76.276,75.389 cw(c77.32,75.389) J5.8@76.582,76.127